# Altium PCB Mikrolysreklamen15.PcbDoc
Units mm, origin at the board's own origin, x right, y up, seen from the top; angles counter-clockwise.
Board outline 110 x 22 mm, 4 copper layers (Top Layer, Internal Plane 1, Internal Plane 2, Bottom Layer), stack 0.971 mm thick; 97 components, 251 nets, 740 pads, 4 vias.
Unrouted connection lines stored in the file: 246.
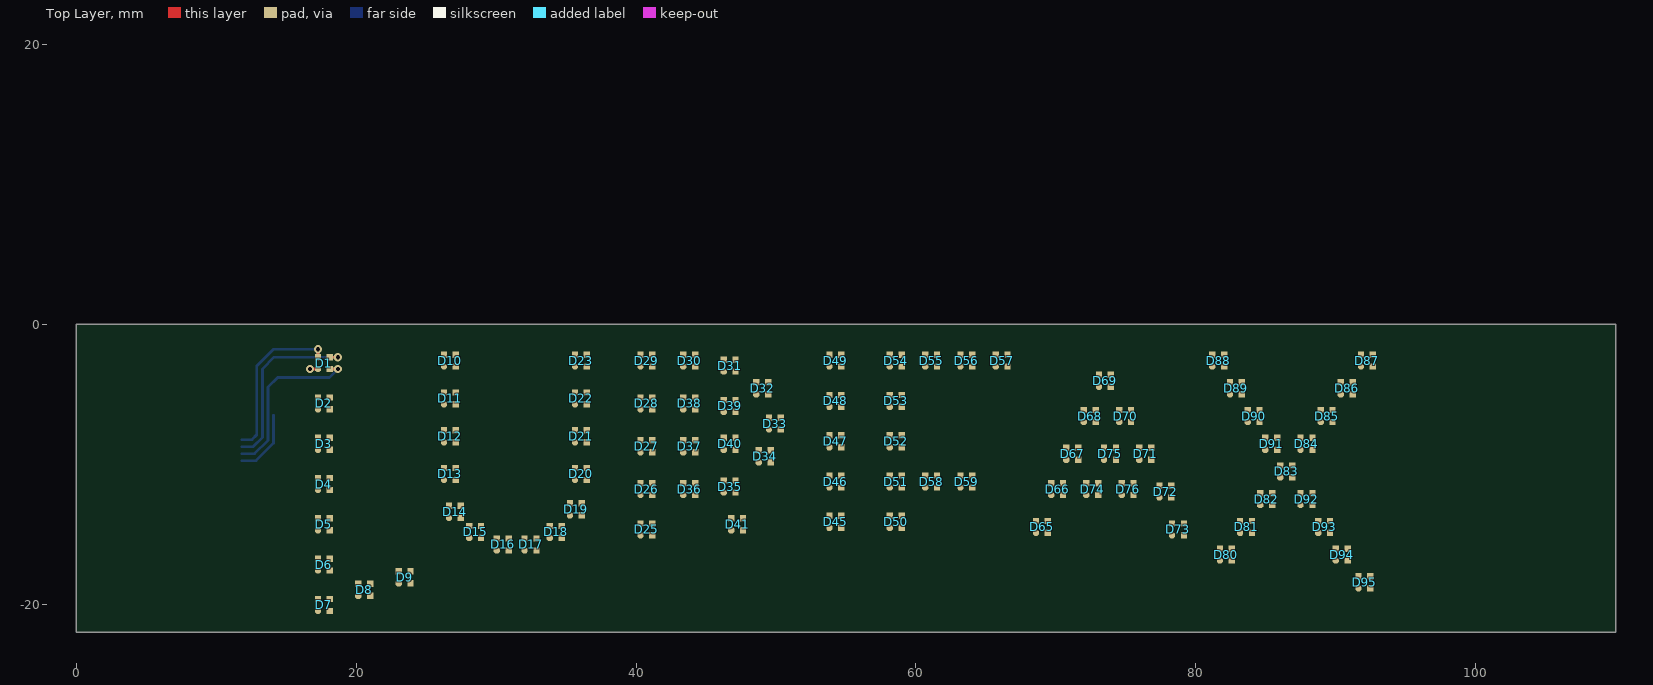
[diagram p0: Top Layer view]
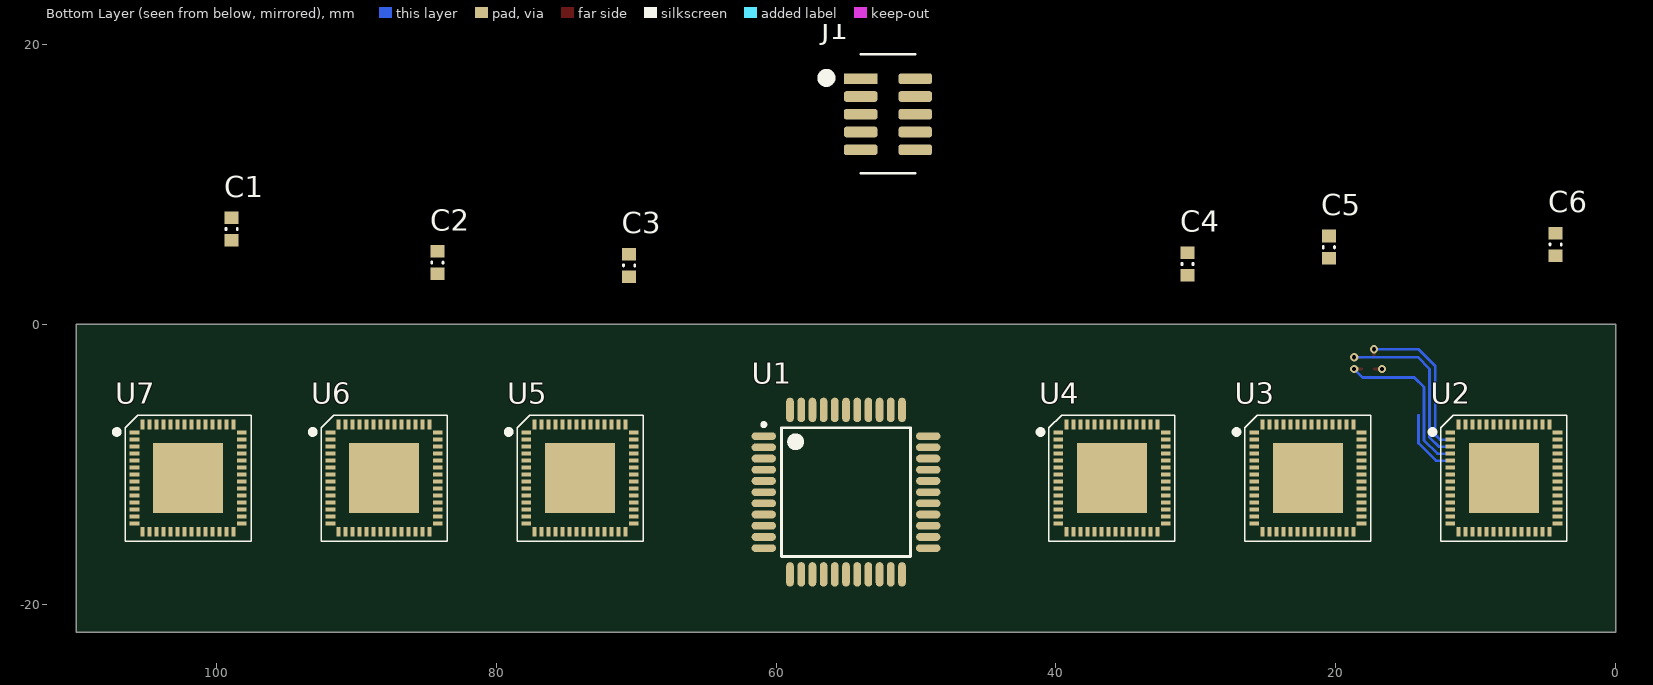
[diagram p1: Bottom Layer view, seen from below]
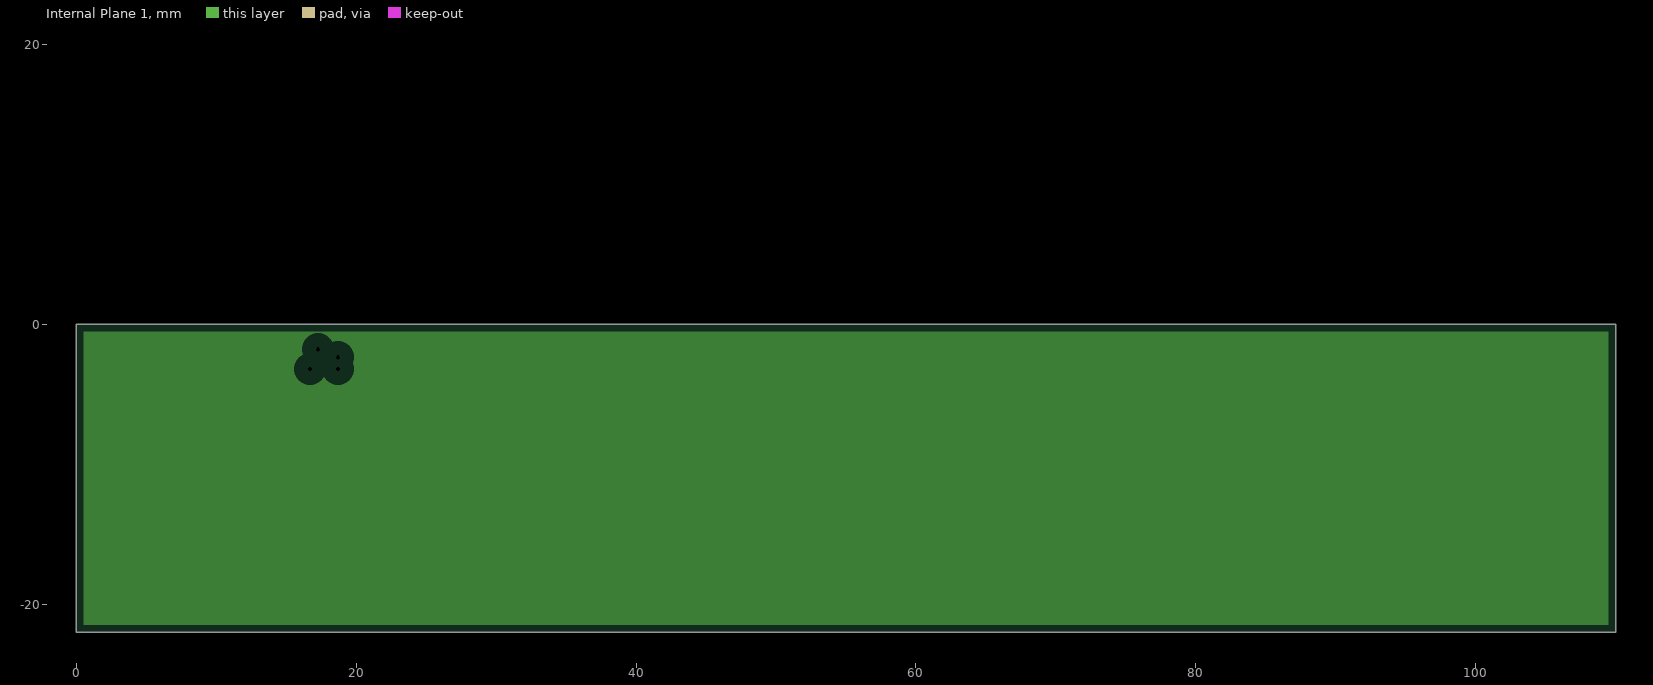
[diagram p2: Internal Plane 1, clearances drawn from the general rule]
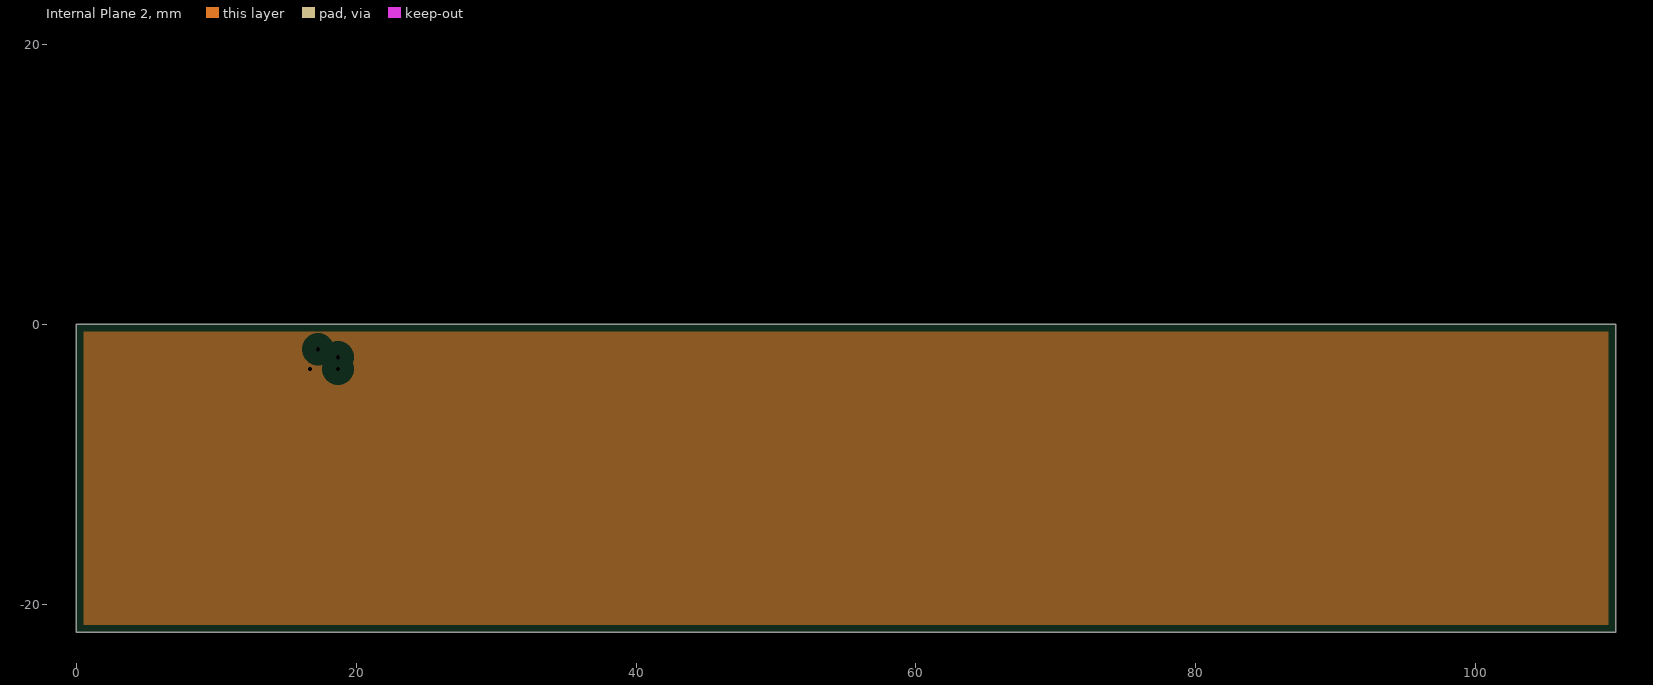
[diagram p3: Internal Plane 2, clearances drawn from the general rule]

## Layer stack, top to bottom
Top Solder: solder mask 0.0102, Solder Resist, Dk 3.5
Top Layer: signal copper 0.0356
Dielectric 3: dielectric 0.254, Dk 4.2
Internal Plane 1: plane copper 0.036, net GND
Dielectric 1: dielectric 0.32, FR-4, Dk 4.8
Internal Plane 2: plane copper 0.036, net VCC_P3V3
Dielectric 2: dielectric 0.254, Dk 4.2
Bottom Layer: signal copper 0.0356
Bottom Solder: solder mask 0.0102, Solder Resist, Dk 3.5

## Board outline
0,-22 0,0 110,0 110,-22 0,-22

## Design rules (kind name [scope] priority, off if disabled: settings)
Clearance [All] p1: gap=0.16 ignorepadtopadclearanceinfootprint=FALSE except(0: Arc-Text Arc-Hole Track-Text Track-Hole SMDPad-Text SMDPad-Hole THPad-Text THPad-Hole Via-Text Via-Hole Fill-Text Fill-Hole Poly-Text Poly-Hole Region-Text Region-Hole Text-Text Text-Hole)
Height [All] p1: minheight=0 maxheight=200 prefheight=12.7
HoleSize [All] p1: absolutevalues=TRUE maxlimit=6.35 minlimit=0.3 maxpercent=80.000 minpercent=20.000
MinimumSolderMaskSliver [All] p1: minsoldermaskwidth=0.1
PlaneClearance [All] p1: clearance=1
PlaneConnect [All] p1: planeconnectstyle=Relief reliefexpansion=0.508 reliefentries=4 reliefconductorwidth=1 reliefairgap=0.254
PolygonConnect [All] p1: connectstyle=Direct reliefconductorwidth=0.254 reliefentries=4 polygonreliefangle="90 Angle" airgapwidth=0.254
RoutingVias [All] p1: holewidth=0.3 width=0.6 viastyle="Through Hole" minholewidth=0.3 minwidth=0.6 maxholewidth=6.35 maxwidth=10
SilkToSolderMaskClearance [IsPad] p1: minsilkscreentomaskgap=0.178 clearancetoexposedcopper=TRUE
SolderMaskExpansion [All] p1: expansion=0.102
Width [All] p1: maxlimit=1 minlimit=0.16 preferedwidth=0.2
24 further rules are at their usual default settings.

## Components (designator, comment, footprint, x,y, rotation, side; value= is the part's Value field where it differs from the comment)
C1 "100nF(0603)" CAPC0603(1608)55_N 98.9,6.8 r270 bottom
C2 "100nF(0603)" CAPC0603(1608)55_N 84.2,4.4 r270 bottom
C3 "100nF(0603)" CAPC0603(1608)55_N 70.5,4.2 r270 bottom
C4 "100nF(0603)" CAPC0603(1608)55_N 30.6,4.3 r270 bottom
C5 "100nF(0603)" CAPC0603(1608)55_N 20.5,5.5 r270 bottom
C6 "100nF(0603)" CAPC0603(1608)55_N 4.3,5.7 r270 bottom
D1 "SX-0402-RGB SMD LED" LED0402SX_N 17.7,-2.78 r0 top
D2 "SX-0402-RGB SMD LED" LED0402SX_N 17.7,-5.66 r0 top
D3 "SX-0402-RGB SMD LED" LED0402SX_N 17.7,-8.54 r0 top
D4 "SX-0402-RGB SMD LED" LED0402SX_N 17.7,-11.42 r0 top
D5 "SX-0402-RGB SMD LED" LED0402SX_N 17.7,-14.3 r0 top
D6 "SX-0402-RGB SMD LED" LED0402SX_N 17.7,-17.18 r0 top
D7 "SX-0402-RGB SMD LED" LED0402SX_N 17.7,-20.06 r0 top
D8 "SX-0402-RGB SMD LED" LED0402SX_N 20.58,-18.98 r0 top
D9 "SX-0402-RGB SMD LED" LED0402SX_N 23.46,-18.08 r0 top
D10 "SX-0402-RGB SMD LED" LED0402SX_N 26.7,-2.6 r0 top
D11 "SX-0402-RGB SMD LED" LED0402SX_N 26.7,-5.3 r0 top
D12 "SX-0402-RGB SMD LED" LED0402SX_N 26.7,-8 r0 top
D13 "SX-0402-RGB SMD LED" LED0402SX_N 26.7,-10.7 r0 top
D14 "SX-0402-RGB SMD LED" LED0402SX_N 27.06,-13.4 r0 top
D15 "SX-0402-RGB SMD LED" LED0402SX_N 28.5,-14.84 r0 top
D16 "SX-0402-RGB SMD LED" LED0402SX_N 30.48,-15.74 r0 top
D17 "SX-0402-RGB SMD LED" LED0402SX_N 32.46,-15.74 r0 top
D18 "SX-0402-RGB SMD LED" LED0402SX_N 34.26,-14.84 r0 top
D19 "SX-0402-RGB SMD LED" LED0402SX_N 35.7,-13.22 r0 top
D20 "SX-0402-RGB SMD LED" LED0402SX_N 36.06,-10.7 r0 top
D21 "SX-0402-RGB SMD LED" LED0402SX_N 36.06,-8 r0 top
D22 "SX-0402-RGB SMD LED" LED0402SX_N 36.06,-5.3 r0 top
D23 "SX-0402-RGB SMD LED" LED0402SX_N 36.06,-2.6 r0 top
D25 "SX-0402-RGB SMD LED" LED0402SX_N 40.74,-14.66 r0 top
D26 "SX-0402-RGB SMD LED" LED0402SX_N 40.74,-11.78 r0 top
D27 "SX-0402-RGB SMD LED" LED0402SX_N 40.74,-8.72 r0 top
D28 "SX-0402-RGB SMD LED" LED0402SX_N 40.74,-5.66 r0 top
D29 "SX-0402-RGB SMD LED" LED0402SX_N 40.74,-2.6 r0 top
D30 "SX-0402-RGB SMD LED" LED0402SX_N 43.8,-2.6 r0 top
D31 "SX-0402-RGB SMD LED" LED0402SX_N 46.68,-2.96 r0 top
D32 "SX-0402-RGB SMD LED" LED0402SX_N 49.02,-4.58 r0 top
D33 "SX-0402-RGB SMD LED" LED0402SX_N 49.92,-7.1 r0 top
D34 "SX-0402-RGB SMD LED" LED0402SX_N 49.2,-9.44 r0 top
D35 "SX-0402-RGB SMD LED" LED0402SX_N 46.68,-11.6 r0 top
D36 "SX-0402-RGB SMD LED" LED0402SX_N 43.8,-11.78 r0 top
D37 "SX-0402-RGB SMD LED" LED0402SX_N 43.8,-8.72 r0 top
D38 "SX-0402-RGB SMD LED" LED0402SX_N 43.8,-5.66 r0 top
D39 "SX-0402-RGB SMD LED" LED0402SX_N 46.68,-5.84 r0 top
D40 "SX-0402-RGB SMD LED" LED0402SX_N 46.68,-8.54 r0 top
D41 "SX-0402-RGB SMD LED" LED0402SX_N 47.22,-14.3 r0 top
D45 "SX-0402-RGB SMD LED" LED0402SX_N 54.24,-14.12 r0 top
D46 "SX-0402-RGB SMD LED" LED0402SX_N 54.24,-11.24 r0 top
D47 "SX-0402-RGB SMD LED" LED0402SX_N 54.24,-8.36 r0 top
D48 "SX-0402-RGB SMD LED" LED0402SX_N 54.24,-5.48 r0 top
D49 "SX-0402-RGB SMD LED" LED0402SX_N 54.24,-2.6 r0 top
D50 "SX-0402-RGB SMD LED" LED0402SX_N 58.56,-14.12 r0 top
D51 "SX-0402-RGB SMD LED" LED0402SX_N 58.56,-11.24 r0 top
D52 "SX-0402-RGB SMD LED" LED0402SX_N 58.56,-8.36 r0 top
D53 "SX-0402-RGB SMD LED" LED0402SX_N 58.56,-5.48 r0 top
D54 "SX-0402-RGB SMD LED" LED0402SX_N 58.56,-2.6 r0 top
D55 "SX-0402-RGB SMD LED" LED0402SX_N 61.08,-2.6 r0 top
D56 "SX-0402-RGB SMD LED" LED0402SX_N 63.6,-2.6 r0 top
D57 "SX-0402-RGB SMD LED" LED0402SX_N 66.12,-2.6 r0 top
D58 "SX-0402-RGB SMD LED" LED0402SX_N 61.08,-11.24 r0 top
D59 "SX-0402-RGB SMD LED" LED0402SX_N 63.6,-11.24 r0 top
D65 "SX-0402-RGB SMD LED" LED0402SX_N 69,-14.48 r0 top
D66 "SX-0402-RGB SMD LED" LED0402SX_N 70.08,-11.78 r0 top
D67 "SX-0402-RGB SMD LED" LED0402SX_N 71.16,-9.26 r0 top
D68 "SX-0402-RGB SMD LED" LED0402SX_N 72.42,-6.56 r0 top
D69 "SX-0402-RGB SMD LED" LED0402SX_N 73.5,-4.04 r0 top
D70 "SX-0402-RGB SMD LED" LED0402SX_N 74.94,-6.56 r0 top
D71 "SX-0402-RGB SMD LED" LED0402SX_N 76.38,-9.26 r0 top
D72 "SX-0402-RGB SMD LED" LED0402SX_N 77.82,-11.96 r0 top
D73 "SX-0402-RGB SMD LED" LED0402SX_N 78.72,-14.66 r0 top
D74 "SX-0402-RGB SMD LED" LED0402SX_N 72.6,-11.78 r0 top
D75 "SX-0402-RGB SMD LED" LED0402SX_N 73.86,-9.26 r0 top
D76 "SX-0402-RGB SMD LED" LED0402SX_N 75.12,-11.78 r0 top
D80 "SX-0402-RGB SMD LED" LED0402SX_N 82.14,-16.46 r0 top
D81 "SX-0402-RGB SMD LED" LED0402SX_N 83.58,-14.48 r0 top
D82 "SX-0402-RGB SMD LED" LED0402SX_N 85.02,-12.5 r0 top
D83 "SX-0402-RGB SMD LED" LED0402SX_N 86.46,-10.52 r0 top
D84 "SX-0402-RGB SMD LED" LED0402SX_N 87.9,-8.54 r0 top
D85 "SX-0402-RGB SMD LED" LED0402SX_N 89.34,-6.56 r0 top
D86 "SX-0402-RGB SMD LED" LED0402SX_N 90.78,-4.58 r0 top
D87 "SX-0402-RGB SMD LED" LED0402SX_N 92.22,-2.6 r0 top
D88 "SX-0402-RGB SMD LED" LED0402SX_N 81.6,-2.6 r0 top
D89 "SX-0402-RGB SMD LED" LED0402SX_N 82.86,-4.58 r0 top
D90 "SX-0402-RGB SMD LED" LED0402SX_N 84.12,-6.56 r0 top
D91 "SX-0402-RGB SMD LED" LED0402SX_N 85.38,-8.54 r0 top
D92 "SX-0402-RGB SMD LED" LED0402SX_N 87.9,-12.5 r0 top
D93 "SX-0402-RGB SMD LED" LED0402SX_N 89.16,-14.48 r0 top
D94 "SX-0402-RGB SMD LED" LED0402SX_N 90.42,-16.46 r0 top
D95 "SX-0402-RGB SMD LED" LED0402SX_N 92.04,-18.44 r0 top
J1 "Header SMD 127 2x5" SMDHDRV10P127_2X5_615X330X560B 52,15 r180 bottom
U1 "AVR ATXMEGA64A4U-AU" TQFP80P1200X1200X120-44N 55,-12 r180 bottom
U2 "TLC5954" TQFN05P815X815X10-56_N 8,-11 r180 bottom
U3 "TLC5954" TQFN05P815X815X10-56_N 22,-11 r180 bottom
U4 "TLC5954" TQFN05P815X815X10-56_N 36,-11 r180 bottom
U5 "TLC5954" TQFN05P815X815X10-56_N 74,-11 r180 bottom
U6 "TLC5954" TQFN05P815X815X10-56_N 88,-11 r180 bottom
U7 "TLC5954" TQFN05P815X815X10-56_N 102,-11 r180 bottom

## Footprints (in the part's own frame and the unit in brackets; to place one, negate y for a bottom-side part, rotate by r counter-clockwise, add the part's x,y. Pads: shape width x height; smd on the part's side, far side on the other; paste and mask are expansions set on the pad)
CAPC0603(1608)55_N [mm] "Chip Capacitor, Body 1.6x0.8mm, Height 0.55mm, IPC Medium Density"
  rect 0.9x1 smd: 1(-0.8,0) 2(0.8,0)
  silkscreen extent -0.05,-0.4 0.05,0.4, body extent -0.87,-0.48 0.88,0.47, height 0.55
LED0402SX_N [mm] "SX-0402-RGB SMD LED"
  oct 0.45x0.45 smd: 1(-0.425,-0.425)
  rect 0.45x0.45 smd: 2(-0.425,0.425) 3(0.425,0.425) 4(0.425,-0.425)
  body extent -0.5,-0.5 0.5,0.5, height 0.65
SMDHDRV10P127_2X5_615X330X560B [mm] "SMD 2X5 Vertical Header"
  rect 2.4x0.76 smd: 1(-1.95,2.54)
  rrect50% 2.4x0.76 smd: 2(1.95,2.54) 3(-1.95,1.27) 4(1.95,1.27) 5(-1.95,0) 6(1.95,0) 7(-1.95,-1.27) 8(1.95,-1.27) 9(-1.95,-2.54) 10(1.95,-2.54)
  silkscreen extent -4.54,-4.21 1.95,4.29
TQFN05P815X815X10-56_N [mm]
  rect 0.69x0.28 smd: 1(-3.835,3.25) 2(-3.835,2.75) 3(-3.835,2.25) 4(-3.835,1.75) 5(-3.835,1.25) 6(-3.835,0.75) 7(-3.835,0.25) 8(-3.835,-0.25) 9(-3.835,-0.75) 10(-3.835,-1.25) 11(-3.835,-1.75) 12(-3.835,-2.25) 13(-3.835,-2.75) 14(-3.835,-3.25) 29(3.835,-3.25) 30(3.835,-2.75) 31(3.835,-2.25) 32(3.835,-1.75) 33(3.835,-1.25) 34(3.835,-0.75) 35(3.835,-0.25) 36(3.835,0.25) 37(3.835,0.75) 38(3.835,1.25) 39(3.835,1.75) 40(3.835,2.25) 41(3.835,2.75) 42(3.835,3.25)
  rect 0.28x0.69 smd: 15(-3.25,-3.835) 16(-2.75,-3.835) 17(-2.25,-3.835) 18(-1.75,-3.835) 19(-1.25,-3.835) 20(-0.75,-3.835) 21(-0.25,-3.835) 22(0.25,-3.835) 23(0.75,-3.835) 24(1.25,-3.835) 25(1.75,-3.835) 26(2.25,-3.835) 27(2.75,-3.835) 28(3.25,-3.835) 43(3.25,3.835) 44(2.75,3.835) 45(2.25,3.835) 46(1.75,3.835) 47(1.25,3.835) 48(0.75,3.835) 49(0.25,3.835) 50(-0.25,3.835) 51(-0.75,3.835) 52(-1.25,3.835) 53(-1.75,3.835) 54(-2.25,3.835) 55(-2.75,3.835) 56(-3.25,3.835)
  rect 5x5 smd: 57(0,0)
  silkscreen extent -5.2,-4.5 4.5,4.5, body extent -4,-4 4,4, height 0.77
TQFP80P1200X1200X120-44N [mm] "TQFP, 44-Leads, Body 10,00x10,00mm, Pitch 0,80mm, IPC Medium Density"
  oval 1.75x0.55 smd: 1(-5.875,4) 2(-5.875,3.2) 3(-5.875,2.4) 4(-5.875,1.6) 5(-5.875,0.8) 6(-5.875,0) 7(-5.875,-0.8) 8(-5.875,-1.6) 9(-5.875,-2.4) 10(-5.875,-3.2) 11(-5.875,-4) 23(5.875,-4) 24(5.875,-3.2) 25(5.875,-2.4) 26(5.875,-1.6) 27(5.875,-0.8) 28(5.875,0) 29(5.875,0.8) 30(5.875,1.6) 31(5.875,2.4) 32(5.875,3.2) 33(5.875,4)
  oval 0.55x1.75 smd: 12(-4,-5.875) 13(-3.2,-5.875) 14(-2.4,-5.875) 15(-1.6,-5.875) 16(-0.8,-5.875) 17(0,-5.875) 18(0.8,-5.875) 19(1.6,-5.875) 20(2.4,-5.875) 21(3.2,-5.875) 22(4,-5.875) 34(4,5.875) 35(3.2,5.875) 36(2.4,5.875) 37(1.6,5.875) 38(0.8,5.875) 39(0,5.875) 40(-0.8,5.875) 41(-1.6,5.875) 42(-2.4,5.875) 43(-3.2,5.875) 44(-4,5.875)
  silkscreen extent -6,-4.6 4.6,4.95, body extent -6.03,-5.97 5.97,6.03, height 1.1

## Part data
C1 C2 C3 C4 C5 C6: library part 3028, "100nF 0603 5% X7R 50V", id=3028, leverandor=Farnell, leverandor_varenr=1759122, navn=100nF(0603), nokkelord="Kondensator, Capacitor, CAP", pakke_opprettet="18.02.2015 14:18:13", pakke_opprettet_av=815, pakketype=93, pris=1, produsent=Multikomp, symbol_opprettet="14.11.2014 20:19:34", symbol_opprettet_av=815
D1 D2 D3 D4 D5 D6 D7 D8 D9 D10 D11 D12 D13 D14 D15 D16 D17 D18 D19 D20 D21 D22 D23 D25 D26 D27 D28 D29 D30 D31 D32 D33 D34 D35 D36 D37 D38 D39 D40 D41 D45 D46 D47 D48 D49 D50 D51 D52 D53 D54 D55 D56 D57 D58 D59 D65 D66 D67 D68 D69 D70 D71 D72 D73 D74 D75 D76 D80 D81 D82 D83 D84 D85 D86 D87 D88 D89 D90 D91 D92 D93 D94 D95: library part 3254, "1010 (metric) SMD RGB LED", antall=40, dybde=0, hylle=2, id=3254, kolonne=4, lager_type=Fremlager, navn="SX-0402-RGB SMD LED", nokkelord="LED, RGB, Lysdiode", pakke_opprettet="15.10.2015 22:30:58", pakke_opprettet_av=815, pakketype=96, pris=1, produsent="SONGXIN LIGHT", rad=4, rom=OV, symbol_opprettet="15.10.2015 22:41:28", symbol_opprettet_av=815
J1: library part 2449, "1,27mm Pitch SMD Header", id=2449, navn="Header SMD 127 2x5", nokkelord=JTAG, pakke_opprettet="15.11.2014 18:30:38", pakke_opprettet_av=815, pakketype=101, pris=20, symbol_opprettet="15.11.2014 18:33:29", symbol_opprettet_av=815
U1: library part 2103, "Mikrokontroller", antall=75, dybde=0, hylle=0, id=2103, kolonne=2, lager_type=Fremlager, navn="AVR ATXMEGA64A4U-AU", pakke_opprettet="22.08.2014 14:00:28", pakke_opprettet_av=774, pakketype=45, pris=0, produsent=Atmel, rad=4, rom=OV, symbol_opprettet="22.08.2014 14:00:55", symbol_opprettet_av=774
U2 U3 U4 U5 U6 U7: library part 3253, "48ch LED Driver with Global Brightness Control, LED Open/Short Detection and Power-Save Mode", antall=40, dybde=0, hylle=2, id=3253, kolonne=4, lager_type=Fremlager, leverandor=DigiKey, leverandor_varenr=296-40587-1-ND, navn=TLC5954, nokkelord="LED, CTRL, controller, kontroller, constant current", pakke_opprettet="15.10.2015 20:40:26", pakke_opprettet_av=815, pakketype=46, pris=60, produsent="Texas Instruments", rad=4, rom=OV, symbol_opprettet="15.10.2015 20:41:10", symbol_opprettet_av=815

## Via types
v1: diameter 0.6, hole 0.3, Top Layer to Bottom Layer, tented both sides, 4 vias

## Nets (pads, with @x,y where several pads share a name; then routed paths per layer and width w, separated by ;. In a path a pad name is that pad's centre, name@x,y a point inside that pad or via, vN(x,y) a via of type N, cw(c..) or ccw(c..) an arc to the next point about the centre after c; other vN are vias at no path point)
GND: C1.1 C2.1 C3.1 C4.1 C5.1 C6.1 U2.1 U2.56 U2.57 U3.1 U3.56 U3.57 U4.1 U4.56 U4.57 U5.1 U5.56 U5.57 U6.1 U6.56 U6.57 U7.1 U7.56 U7.57
NetD1_2: D1.2 U2.2 | length 11.6
  Top Layer w0.2: D1.2 v1(17.275,-1.785)
  Bottom Layer w0.2: U2.2 12.55,-8.25 12.9,-7.9 12.9,-3 14.115,-1.785 v1(17.275,-1.785)
NetD1_3: D1.3 U2.3 | length 12.9
  Top Layer w0.2: D1.3 v1(18.695,-2.355)
  Bottom Layer w0.2: U2.3 12.65,-8.75 13.3,-8.1 13.3,-3.2 14.145,-2.355 v1(18.695,-2.355)
NetD1_4: D1.4 U2.4 | length 12.2
  Top Layer w0.2: D1.4 v1(18.695,-3.205)
  Bottom Layer w0.2: U2.4 12.75,-9.25 13.7,-8.3 13.7,-4.5 14.4,-3.8 18.1,-3.8 v1(18.695,-3.205)
NetD2_2: D2.2 U2.5 | length 4.8
  Bottom Layer w0.2: U2.5 12.85,-9.75 14.1,-8.5 14.1,-6.5
NetD2_3: D2.3 U2.6
NetD2_4: D2.4 U2.7
NetD3_2: D3.2 U2.8
NetD3_3: D3.3 U2.9
NetD3_4: D3.4 U2.10
NetD4_2: D4.2 U2.11
NetD4_3: D4.3 U2.12
NetD4_4: D4.4 U2.13
NetD5_2: D5.2 U2.14
NetD5_3: D5.3 U2.15
NetD5_4: D5.4 U2.16
NetD6_2: D6.2 U2.17
NetD6_3: D6.3 U2.18
NetD6_4: D6.4 U2.19
NetD7_2: D7.2 U2.20
NetD7_3: D7.3 U2.21
NetD7_4: D7.4 U2.22
NetD8_2: D8.2 U2.23
NetD8_3: D8.3 U2.24
NetD8_4: D8.4 U2.25
NetD9_2: D9.2 U2.30
NetD9_3: D9.3 U2.31
NetD9_4: D9.4 U2.32
NetD10_2: D10.2 U2.33
NetD10_3: D10.3 U2.34
NetD10_4: D10.4 U2.35
NetD11_2: D11.2 U2.36
NetD11_3: D11.3 U2.37
NetD11_4: D11.4 U2.38
NetD12_2: D12.2 U2.39
NetD12_3: D12.3 U2.40
NetD12_4: D12.4 U2.41
NetD13_2: D13.2 U2.44
NetD13_3: D13.3 U2.45
NetD13_4: D13.4 U2.46
NetD14_2: D14.2 U2.47
NetD14_3: D14.3 U2.48
NetD14_4: D14.4 U2.49
NetD15_2: D15.2 U2.50
NetD15_3: D15.3 U2.51
NetD15_4: D15.4 U2.52
NetD16_2: D16.2 U2.53
NetD16_3: D16.3 U2.54
NetD16_4: D16.4 U2.55
NetD17_2: D17.2 U3.2
NetD17_3: D17.3 U3.3
NetD17_4: D17.4 U3.4
NetD18_2: D18.2 U3.5
NetD18_3: D18.3 U3.6
NetD18_4: D18.4 U3.7
NetD19_2: D19.2 U3.8
NetD19_3: D19.3 U3.9
NetD19_4: D19.4 U3.10
NetD20_2: D20.2 U3.11
NetD20_3: D20.3 U3.12
NetD20_4: D20.4 U3.13
NetD21_2: D21.2 U3.14
NetD21_3: D21.3 U3.15
NetD21_4: D21.4 U3.16
NetD22_2: D22.2 U3.17
NetD22_3: D22.3 U3.18
NetD22_4: D22.4 U3.19
NetD23_2: D23.2 U3.20
NetD23_3: D23.3 U3.21
NetD23_4: D23.4 U3.22
NetD25_2: D25.2 U3.30
NetD25_3: D25.3 U3.31
NetD25_4: D25.4 U3.32
NetD26_2: D26.2 U3.33
NetD26_3: D26.3 U3.34
NetD26_4: D26.4 U3.35
NetD27_2: D27.2 U3.36
NetD27_3: D27.3 U3.37
NetD27_4: D27.4 U3.38
NetD28_2: D28.2 U3.39
NetD28_3: D28.3 U3.40
NetD28_4: D28.4 U3.41
NetD29_2: D29.2 U3.44
NetD29_3: D29.3 U3.45
NetD29_4: D29.4 U3.46
NetD30_2: D30.2 U3.47
NetD30_3: D30.3 U3.48
NetD30_4: D30.4 U3.49
NetD31_2: D31.2 U3.50
NetD31_3: D31.3 U3.51
NetD31_4: D31.4 U3.52
NetD32_2: D32.2 U3.53
NetD32_3: D32.3 U3.54
NetD32_4: D32.4 U3.55
NetD33_2: D33.2 U4.2
NetD33_3: D33.3 U4.3
NetD33_4: D33.4 U4.4
NetD34_2: D34.2 U4.5
NetD34_3: D34.3 U4.6
NetD34_4: D34.4 U4.7
NetD35_2: D35.2 U4.8
NetD35_3: D35.3 U4.9
NetD35_4: D35.4 U4.10
NetD36_2: D36.2 U4.11
NetD36_3: D36.3 U4.12
NetD36_4: D36.4 U4.13
NetD37_2: D37.2 U4.14
NetD37_3: D37.3 U4.15
NetD37_4: D37.4 U4.16
NetD38_2: D38.2 U4.17
NetD38_3: D38.3 U4.18
NetD38_4: D38.4 U4.19
NetD39_2: D39.2 U4.20
NetD39_3: D39.3 U4.21
NetD39_4: D39.4 U4.22
NetD40_2: D40.2 U4.23
NetD40_3: D40.3 U4.24
NetD40_4: D40.4 U4.25
NetD41_2: D41.2 U4.30
NetD41_3: D41.3 U4.31
NetD41_4: D41.4 U4.32
NetD45_2: D45.2 U4.44
NetD45_3: D45.3 U4.45
NetD45_4: D45.4 U4.46
NetD46_2: D46.2 U4.47
NetD46_3: D46.3 U4.48
NetD46_4: D46.4 U4.49
NetD47_2: D47.2 U4.50
NetD47_3: D47.3 U4.51
NetD47_4: D47.4 U4.52
NetD48_2: D48.2 U4.53
NetD48_3: D48.3 U4.54
NetD48_4: D48.4 U4.55
NetD49_2: D49.2 U5.2
NetD49_3: D49.3 U5.3
NetD49_4: D49.4 U5.4
NetD50_2: D50.2 U5.5
NetD50_3: D50.3 U5.6
NetD50_4: D50.4 U5.7
NetD51_2: D51.2 U5.8
NetD51_3: D51.3 U5.9
NetD51_4: D51.4 U5.10
NetD52_2: D52.2 U5.11
NetD52_3: D52.3 U5.12
NetD52_4: D52.4 U5.13
NetD53_2: D53.2 U5.14
NetD53_3: D53.3 U5.15
NetD53_4: D53.4 U5.16
NetD54_2: D54.2 U5.17
NetD54_3: D54.3 U5.18
NetD54_4: D54.4 U5.19
NetD55_2: D55.2 U5.20
NetD55_3: D55.3 U5.21
NetD55_4: D55.4 U5.22
NetD56_2: D56.2 U5.23
NetD56_3: D56.3 U5.24
NetD56_4: D56.4 U5.25
NetD57_2: D57.2 U5.30
NetD57_3: D57.3 U5.31
NetD57_4: D57.4 U5.32
NetD58_2: D58.2 U5.33
NetD58_3: D58.3 U5.34
NetD58_4: D58.4 U5.35
NetD59_2: D59.2 U5.36
NetD59_3: D59.3 U5.37
NetD59_4: D59.4 U5.38
NetD65_2: D65.2 U6.2
NetD65_3: D65.3 U6.3
NetD65_4: D65.4 U6.4
NetD66_2: D66.2 U6.5
NetD66_3: D66.3 U6.6
NetD66_4: D66.4 U6.7
NetD67_2: D67.2 U6.8
NetD67_3: D67.3 U6.9
NetD67_4: D67.4 U6.10
NetD68_2: D68.2 U6.11
NetD68_3: D68.3 U6.12
NetD68_4: D68.4 U6.13
NetD69_2: D69.2 U6.14
NetD69_3: D69.3 U6.15
NetD69_4: D69.4 U6.16
NetD70_2: D70.2 U6.17
NetD70_3: D70.3 U6.18
NetD70_4: D70.4 U6.19
NetD71_2: D71.2 U6.20
NetD71_3: D71.3 U6.21
NetD71_4: D71.4 U6.22
NetD72_2: D72.2 U6.23
NetD72_3: D72.3 U6.24
NetD72_4: D72.4 U6.25
NetD73_2: D73.2 U6.30
NetD73_3: D73.3 U6.31
NetD73_4: D73.4 U6.32
NetD74_2: D74.2 U6.33
NetD74_3: D74.3 U6.34
NetD74_4: D74.4 U6.35
NetD75_2: D75.2 U6.36
NetD75_3: D75.3 U6.37
NetD75_4: D75.4 U6.38
NetD76_2: D76.2 U6.39
NetD76_3: D76.3 U6.40
NetD76_4: D76.4 U6.41
NetD80_2: D80.2 U6.53
NetD80_3: D80.3 U6.54
NetD80_4: D80.4 U6.55
NetD81_2: D81.2 U7.2
NetD81_3: D81.3 U7.3
NetD81_4: D81.4 U7.4
NetD82_2: D82.2 U7.5
NetD82_3: D82.3 U7.6
NetD82_4: D82.4 U7.7
NetD83_2: D83.2 U7.8
NetD83_3: D83.3 U7.9
NetD83_4: D83.4 U7.10
NetD84_2: D84.2 U7.11
NetD84_3: D84.3 U7.12
NetD84_4: D84.4 U7.13
NetD85_2: D85.2 U7.14
NetD85_3: D85.3 U7.15
NetD85_4: D85.4 U7.16
NetD86_2: D86.2 U7.17
NetD86_3: D86.3 U7.18
NetD86_4: D86.4 U7.19
NetD87_2: D87.2 U7.20
NetD87_3: D87.3 U7.21
NetD87_4: D87.4 U7.22
NetD88_2: D88.2 U7.23
NetD88_3: D88.3 U7.24
NetD88_4: D88.4 U7.25
NetD89_2: D89.2 U7.30
NetD89_3: D89.3 U7.31
NetD89_4: D89.4 U7.32
NetD90_2: D90.2 U7.33
NetD90_3: D90.3 U7.34
NetD90_4: D90.4 U7.35
NetD91_2: D91.2 U7.36
NetD91_3: D91.3 U7.37
NetD91_4: D91.4 U7.38
NetD92_2: D92.2 U7.39
NetD92_3: D92.3 U7.40
NetD92_4: D92.4 U7.41
NetD93_2: D93.2 U7.44
NetD93_3: D93.3 U7.45
NetD93_4: D93.4 U7.46
NetD94_2: D94.2 U7.47
NetD94_3: D94.3 U7.48
NetD94_4: D94.4 U7.49
NetD95_2: D95.2 U7.50
NetD95_3: D95.3 U7.51
NetD95_4: D95.4 U7.52
VCC_P3V3: C1.2 C2.2 C3.2 C4.2 C5.2 C6.2 D1.1 D2.1 D3.1 D4.1 D5.1 D6.1 D7.1 D8.1 D9.1 D10.1 D11.1 D12.1 D13.1 D14.1 D15.1 D16.1 D17.1 D18.1 D19.1 D20.1 D21.1 D22.1 D23.1 D25.1 D26.1 D27.1 D28.1 D29.1 D30.1 D31.1 D32.1 D33.1 D34.1 D35.1 D36.1 D37.1 D38.1 D39.1 D40.1 D41.1 D45.1 D46.1 D47.1 D48.1 D49.1 D50.1 D51.1 D52.1 D53.1 D54.1 D55.1 D56.1 D57.1 D58.1 D59.1 D65.1 D66.1 D67.1 D68.1 D69.1 D70.1 D71.1 D72.1 D73.1 D74.1 D75.1 D76.1 D80.1 D81.1 D82.1 D83.1 D84.1 D85.1 D86.1 D87.1 D88.1 D89.1 D90.1 D91.1 D92.1 D93.1 D94.1 D95.1 U2.43 U3.43 U4.43 U5.43 U6.43 U7.43 | length 0.6
  Top Layer w0.2: v1(16.705,-3.205) D1.1
pads on no net: J1.1 J1.2 J1.3 J1.4 J1.5 J1.6 J1.7 J1.8 J1.9 J1.10 U1.1 U1.2 U1.3 U1.4 U1.5 U1.6 U1.7 U1.8 U1.9 U1.10 U1.11 U1.12 U1.13 U1.14 U1.15 U1.16 U1.17 U1.18 U1.19 U1.20 U1.21 U1.22 U1.23 U1.24 U1.25 U1.26 U1.27 U1.28 U1.29 U1.30 U1.31 U1.32 U1.33 U1.34 U1.35 U1.36 U1.37 U1.38 U1.39 U1.40 U1.41 U1.42 U1.43 U1.44 U2.26 U2.27 U2.28 U2.29 U2.42 U3.23 U3.24 U3.25 U3.26 U3.27 U3.28 U3.29 U3.42 U4.26 U4.27 U4.28 U4.29 U4.33 U4.34 U4.35 U4.36 U4.37 U4.38 U4.39 U4.40 U4.41 U4.42 U5.26 U5.27 U5.28 U5.29 U5.39 U5.40 U5.41 U5.42 U5.44 U5.45 U5.46 U5.47 U5.48 U5.49 U5.50 U5.51 U5.52 U5.53 U5.54 U5.55 U6.26 U6.27 U6.28 U6.29 U6.42 U6.44 U6.45 U6.46 U6.47 U6.48 U6.49 U6.50 U6.51 U6.52 U7.26 U7.27 U7.28 U7.29 U7.42 U7.53 U7.54 U7.55

## Polygon pours and split planes (outlines as drawn)
GND on Internal Plane 1 (split plane): 109.49,-21.49 0.51,-21.49 0.51,-0.51 109.49,-0.51
VCC_P3V3 on Internal Plane 2 (split plane): 109.49,-21.49 0.51,-21.49 0.51,-0.51 109.49,-0.51

## Silkscreen, mask and mechanical layers (free items; w line width, h text height)
Top Overlay:
  text "b" at 19,-65 h80